# Allegro board micro_usb.brd
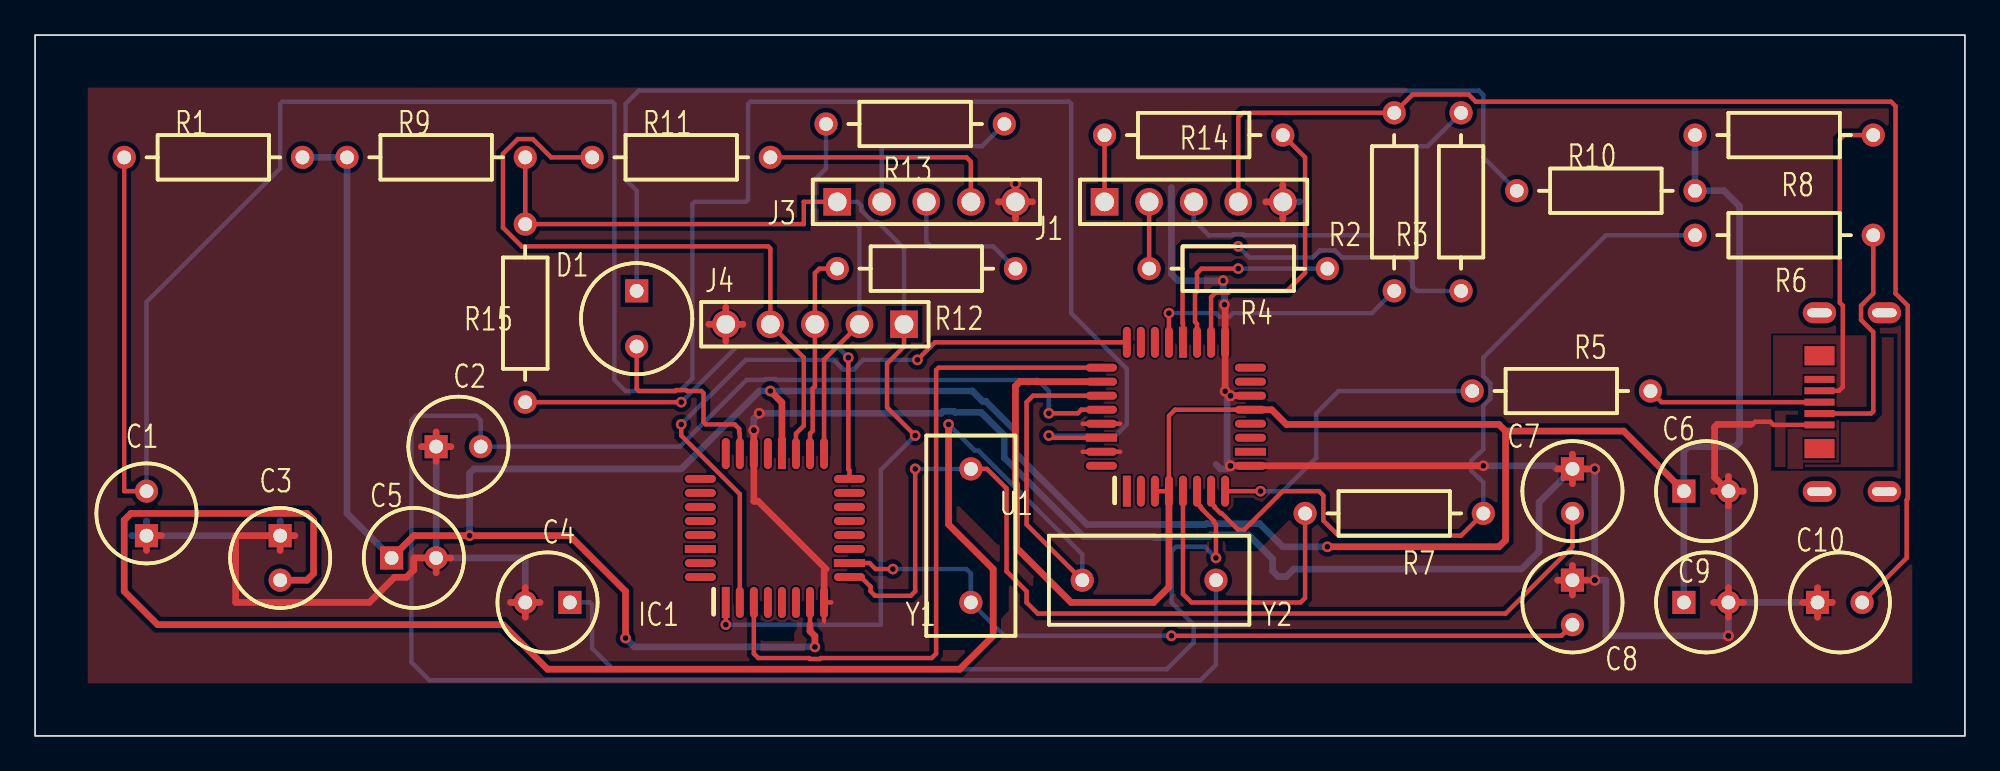
[diagram p0: board, top side]
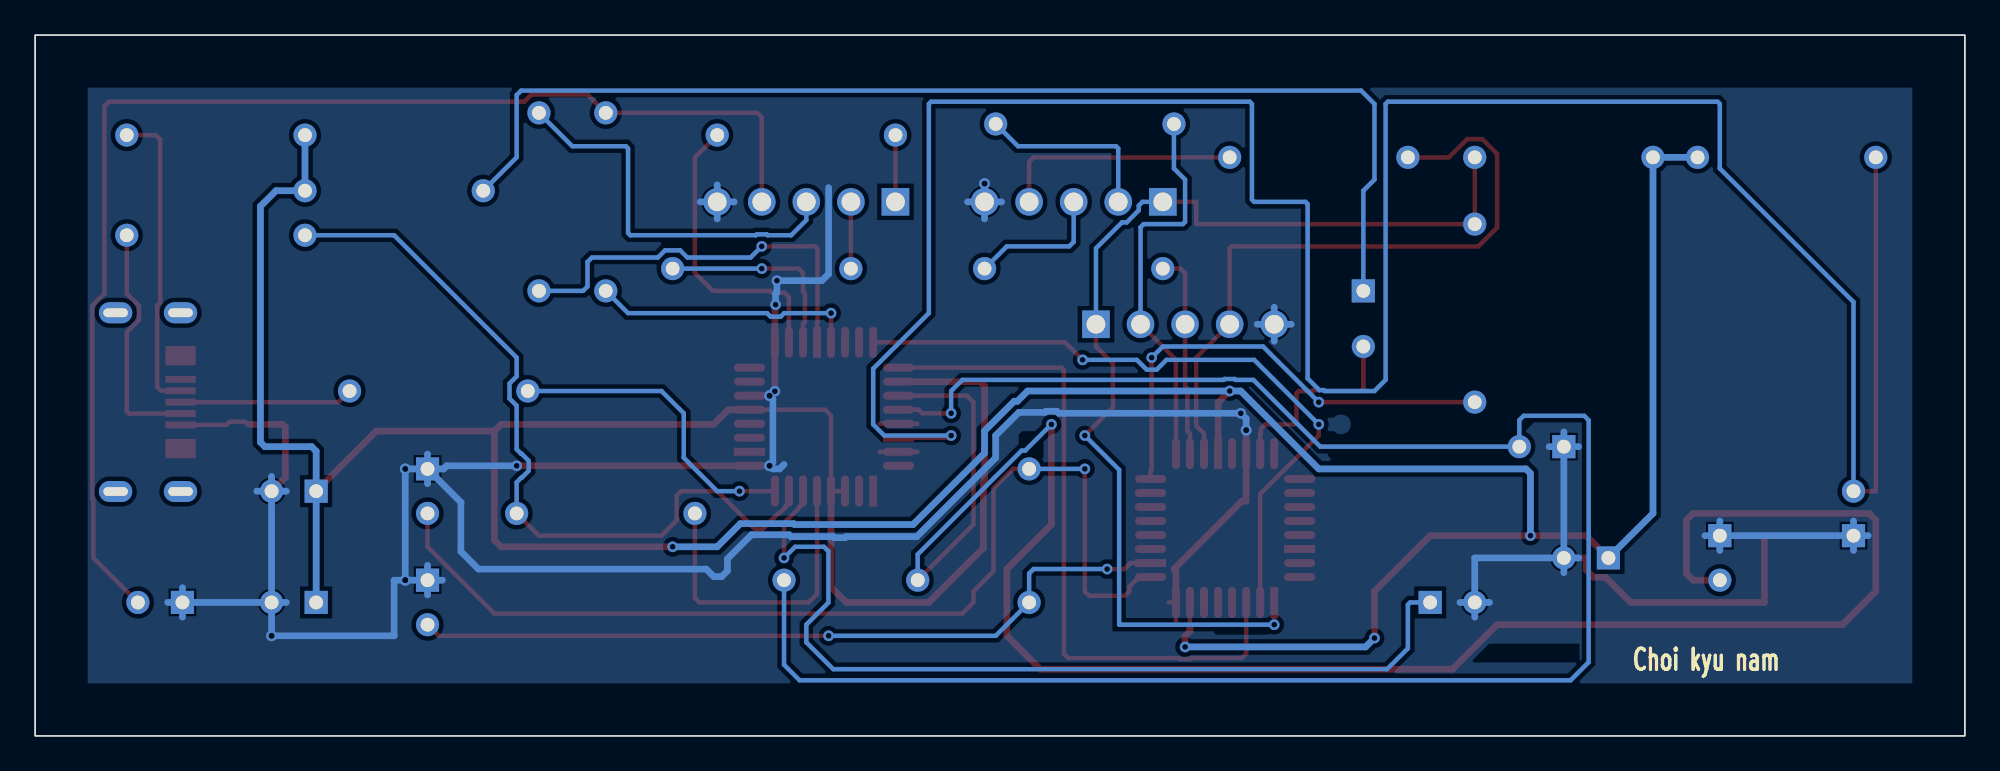
[diagram p1: board, bottom side, seen from below]

Outline 110 x 40 mm; copper layers: TOP, BOTTOM. Coordinates in mm from the lower left corner of the outline.
Outline path: rectangle 0,0 110,40

## Design rules (mm)
net group POWERNETS: nets GND VCC

## Placement (name value [footprint] x y rotation side)
C1  47nF  [CPCYL1D225LS100031]  6.35 11.43 90 top
C2  27pF  [CPCYL1D225LS100031]  22.86 16.51 0 top
C3  27pF  [CPCYL1D225LS100031]  13.97 11.43 270 top
C4  47nF  [CPCYL1D225LS100031]  30.48 7.62 180 top
C5  100nF  [CPCYL1D225LS100031]  20.32 10.16 0 top
C6  1uF  [CPCYL1D225LS100031]  93.98 13.97 0 top
C7  100nF  [CPCYL1D225LS100031]  87.63 15.24 270 top
C8  100nF  [CPCYL1D225LS100031]  87.63 8.89 270 top
C9  100nF  [CPCYL1D225LS100031]  93.98 7.62 0 top
C10  22nF  [CPCYL1D225LS100031]  101.6 7.62 0 top
D1  LED  [CYLD250LS125031]  34.29 25.4 270 top
IC1  ATmega8  [QUAD80M32WG900]  39.37 7.62 0 top
J1  bbpg_Bitbang  [BLKCON100VHTM1SQSW1005]  60.96 30.48 0 top
J2  USBA  [MICRO_USB]  105.41 19.05 90 top
J3  avrusb500_out  [BLKCON100VHTM1SQSW1005]  45.72 30.48 0 top
J4  firmware_in  [BLKCON100VHTM1SQSW1005]  49.53 23.5 180 top
NOREF  -  []  110 0 90 top
NOREF#2  -  []  0 40 0 top
R1  470  [AX400X100031]  5.08 33.02 0 top
R2  220  [AX400X100031]  77.47 25.4 90 top
R3  220  [AX400X100031]  81.28 25.4 90 top
R4  220  [AX400X100031]  73.66 26.67 180 top
R5  27  [AX400X100031]  92.08 19.68 180 top
R6  27  [AX400X100031]  104.78 28.57 180 top
R7  1.5k  [AX400X100031]  82.55 12.7 180 top
R8  2.2  [AX400X100031]  104.78 34.29 180 top
R9  10k  [AX400X100031]  17.78 33.02 0 top
R10  470  [AX400X100031]  84.45 31.11 0 top
R11  1k  [AX400X100031]  31.75 33.02 0 top
R12  220  [AX400X100031]  45.72 26.67 0 top
R13  1k  [AX400X100031]  45.09 34.92 0 top
R14  220  [AX400X100031]  71.12 34.29 180 top
R15  220  [AX400X100031]  27.94 19.05 90 top
U1  FT232BM  [QUAD80M32WG900]  62.23 13.97 0 top
Y1  3.6864Mhz  [RAD450X200LS300031]  53.34 7.62 90 top
Y2  6Mhz  [RAD450X200LS300031]  67.31 8.89 180 top

## Library data of the parts
C1-C5 C7-C10 = CAPACITOR NON-POL: alternate symbols: (SMDCAP)
C6 = CAPACITOR POL: alternate symbols: (SMDCAP)
D1 = LED
IC1 = ATmega8-DIL28_1
J1 J3 J4 = CON5
J2 = CON4_7
R1-R15 = R: alternate symbols: (SMDRES)
U1 = FT232BM_2
Y1 Y2 = ZTA

## Footprints (pads in the part's own frame, mm; a bottom-side part is the same pattern mirrored in y, then rotated)
AX400X100031
  round 1.321 hole 0.787: 1(0,0) 2(10.16,0)
BLKCON100VHTM1SQSW1005
  rect 1.575x1.575 hole 1.067: 1(0,0)
  round 1.575 hole 1.067: 2(2.54,0) 3(5.08,0) 4(7.62,0) 5(10.16,0)
CPCYL1D225LS100031
  rect 1.321x1.321 hole 0.787: 1(0,0)
  round 1.321 hole 0.787: 2(2.54,0)
CYLD250LS125031
  rect 1.321x1.321 hole 0.787: 1(0,0)
  round 1.321 hole 0.787: 2(3.175,0)
MICRO_USB
  oval 1.2x1.9 hole 0.5x1.4: (-5.1,3.7) (-5.1,0) (5.1,3.7) (5.1,0)
  rect 1.1x1.72 smd: (-2.65,3.7) (2.65,3.7)
  rect 0.4x1.72 smd: 1(-1.3,3.7) 2(-0.65,3.7) 3(0,3.7) 4(0.65,3.7) 5(1.3,3.7)
QUAD80M32WG900
  rect 0.457x1.778 smd: 1(0,0) 20(3.2,8.496)
  oval 0.457x1.778 smd: 2(0.8,0) 3(1.6,0) 4(2.4,0) 5(3.2,0) 6(4,0) 7(4.801,0) 8(5.601,0) 17(5.601,8.496) 18(4.801,8.496) 19(4,8.496) 21(2.4,8.496) 22(1.6,8.496) 23(0.8,8.496) 24(0,8.496)
  oval 1.778x0.457 smd: 9(7.048,1.448) 11(7.048,3.048) 12(7.048,3.848) 13(7.048,4.648) 14(7.048,5.448) 15(7.048,6.248) 16(7.048,7.048) 25(-1.448,7.048) 26(-1.448,6.248) 27(-1.448,5.448) 28(-1.448,4.648) 29(-1.448,3.848) 31(-1.448,2.248) 32(-1.448,1.448)
  rect 1.778x0.457 smd: 10(7.048,2.248) 30(-1.448,3.048)
RAD450X200LS300031
  round 1.321 hole 0.787: 1(0,0) 2(7.62,0)

## Nets
+5V: J2.4 R8.1
GND: C1.1 C2.1 C3.1 C4.2 C5.2 C6.2 C7.1 C8.1 C9.2 C10.1 IC1.8(GND) IC1.22(AGND) J1.5 J2.1 J3.5 J4.5 U1.9(GND) U1.14(PWRCTL) U1.17(GND1) U1.29(AGND) U1.31(TEST)
VCC: C5.1 C6.1 C9.1 IC1.7(VCC) IC1.20(AVCC) R1.2 R8.2 R9.1 R10.2 U1.3(VCC) U1.4(RESET#) U1.13(VCC-IO) U1.26(VCC1)
BMISO: J1.3 R3.2
BMOSI: J1.2 R4.2
BRESET: J1.1 R14.2
BSCK: C10.2 J1.4 R2.2
D+: J2.2 R6.1
D-: J2.3 R5.1
F_MISO: IC1.18((MISO) PB4) J4.3 R12.1
F_MOSI: IC1.17((OC2/MOSI) PB3) J4.2 R13.1
F_SCK: IC1.19((SCK) PB5) J4.4 R11.1
MISO: J3.3 R12.2
MOSI: J3.2 R13.2
RESET: IC1.1(PC6 (R\E\S\E\T\)) J3.1 J4.1 R9.2 R15.2
RXD: IC1.2(PD0 (RXD)) U1.24(RXD)
SCK: J3.4 R11.2
TXD: IC1.3(PD1 (TXD)) U1.25(TXD)
N02483: R6.2 R7.1 U1.7(USBDP)
N02615: R5.2 U1.8(USBDM)
N03527: C4.1 U1.6(3V3OUT)
N06839: R2.1 U1.21(DTR#)
N06967: R3.1 U1.20(DSR#)
N07033: R4.1 U1.19(DCD#)
N07247: R14.1 U1.18(RI#)
N11951: R7.2 U1.5(RSTOUT#)
N15182: C7.2 IC1.9(PB6 (XT1/TOSC1)) Y1.2
N15289: C8.2 IC1.10(PB7 (XT2/TOSC2)) Y1.1
N19734: D1.2(CATHODE) IC1.23((ADC0) PC0)
N20572: D1.1(ANODE) R10.1
N22544: IC1.16((SS/OC1B) PB2) R15.1
N41098: C3.2 U1.27(XTIN) Y2.2
N41106: C2.2 U1.28(XTOUT) Y2.1
N49165: C1.2 R1.1 U1.30(AVCC)

Pads without a net: IC1 4 5 6 11 12 13 14 15 21 24 25 26 27 28 29 30 31 32; J2 5; U1 1 2 10 11 12 15 16 22 23 32

## Via types
v1: diameter 0.61, hole 0.33, TOP to BOTTOM, 42 vias

## Routing (per net, layer and track width the routed paths; a pad name or vN(x,y) marks a point on that pad's centre or on a via; arc(x,y) is an arc through that point)
+5V: length 17.6
  TOP w0.254: J2.4 102.82,19.7 103.04,19.92 103.04,24.56 102.87,24.73 102.87,34.04 103.12,34.29 R8.1
GND: length 271.5
  TOP w0.254: 45.38,7.62 IC1.8 44.97,6.55 ; 59.71,17.82 U1.29 61.85,17.82 ; J2.1 99.09,17.75 98.91,17.93 98.04,17.93 97.89,17.78 97.79,17.78 ; 61.85,16.22 U1.31 59.71,16.22
  TOP w0.381: 96.52,13.13 C6.2 ; C6.2 95.73,14.76 95.73,17.63 95.89,17.78 97.79,17.78 ; C6.2 97.36,13.97 ; C6.2 95.68,13.97 ; C6.2 96.52,14.81 ; 6.35,10.59 C1.1 7.19,11.43 ; 96.52,6.78 C9.2 ; C9.2 96.52,8.46 ; C9.2 95.68,7.62 ; C9.2 97.36,7.62 ; 71.12,29.51 J1.5 ; J1.5 70.15,30.48 ; J1.5 71.12,31.45 ; 100.76,7.62 C10.1 ; C10.1 101.6,8.46 ; C10.1 101.6,6.78 ; C10.1 102.44,7.62 ; 13.97,10.59 C3.1 ; C3.1 14.81,11.43 ; C3.1 11.43,11.43 11.43,7.62 19.05,7.62 20.48,9.05 21.16,9.05 21.59,9.48 21.59,10.16 21.88,10.16 ; J4.5 40.34,23.5 ; J4.5 38.4,23.5 ; J4.5 39.37,22.53 ; J4.5 39.37,24.46 ; 87.63,14.4 C7.1 ; C7.1 88.47,15.24 ; C7.1 86.79,15.24 ; C7.1 87.63,16.08 ; 22.86,9.32 C5.2 ; C5.2 23.7,10.16 ; C5.2 22.02,10.16 ; v1(82.55,15.42) U1.9 v1(68.14,15.42) ; 55.88,29.51 J3.5 ; J3.5 54.91,30.48 ; J3.5 56.85,30.48 ; J3.5 55.88,31.45 ; v1(67.79,24.61) 67.83,24.57 U1.17 v1(67.83,19.67) ; C2.1 22.86,17.35 ; C2.1 22.86,15.67 ; C2.1 23.7,16.51 ; C2.1 22.02,16.51 ; 44.97,9.4 IC1.8 ; C4.2 28.78,7.62 ; C4.2 27.1,7.62 ; C4.2 27.94,6.78 ; C4.2 27.94,8.46 ; U1.14 v1(68.14,19.42) ; v1(40.97,17.45) IC1.22 40.97,13.4 41.21,13.4 45.09,9.53 ; 87.63,8.05 C8.1 ; C8.1 88.47,8.89 ; C8.1 86.79,8.89 ; C8.1 87.63,9.73
  BOTTOM w0.381: J1.5 71.12,31.45 ; J1.5 70.15,30.48 ; J1.5 71.12,29.51 ; J1.5 72.09,30.48 ; 38.4,23.5 J4.5 ; J4.5 39.37,24.46 ; J4.5 40.34,23.5 ; J4.5 39.37,22.53 ; 54.91,30.48 J3.5 ; J3.5 v1(55.88,31.52) ; J3.5 55.88,29.51 ; J3.5 56.85,30.48 ; C10.1 C9.2 ; C10.1 102.44,7.62 ; C10.1 101.6,8.46 ; C10.1 101.6,6.78 ; C9.2 95.68,7.62 ; C9.2 v1(96.52,5.71) 89.53,5.71 89.53,8.89 v1(88.9,8.89) ; C9.2 C6.2 ; 87.63,8.05 C8.1 ; C8.1 v1(88.9,8.89) ; C8.1 87.63,9.73 ; C8.1 86.79,8.89 ; C2.1 C5.2 ; C2.1 23.7,16.51 ; C2.1 22.86,17.35 ; C2.1 22.02,16.51 ; C5.2 22.86,9.32 ; C5.2 22.02,10.16 ; C5.2 27.94,10.16 C4.2 ; v1(67.83,19.67) 68.08,19.42 v1(68.14,19.42) 67.94,19.23 67.94,15.61 v1(68.14,15.42) 67.96,15.24 67.56,15.24 67.31,15.49 ; 13.97,10.59 C3.1 ; C3.1 13.97,12.27 ; C3.1 14.81,11.43 ; C3.1 C1.1 ; C4.2 28.78,7.62 ; C4.2 27.94,6.78 ; C4.2 27.1,7.62 ; v1(88.9,8.89) v1(88.9,15.24) C7.1 ; v1(40.97,17.45) 40.97,18.11 v1(41.27,18.41) 51.65,18.41 51.76,18.53 52.38,18.53 52.44,18.47 53.92,18.47 55.24,17.14 55.24,15.88 59.74,11.38 63.76,11.38 63.83,11.31 64.44,11.31 64.51,11.38 66.92,11.38 67.03,11.48 69.16,11.48 70.54,10.11 70.54,9.42 70.86,9.1 71.32,9.1 71.75,9.53 84.73,9.53 85.72,10.52 85.72,13.34 C7.1 ; C6.2 97.36,13.97 ; C6.2 96.52,14.81 ; C6.2 95.68,13.97 ; C1.1 6.35,12.27 ; C1.1 5.51,11.43 ; C1.1 6.35,10.59 ; C7.1 86.72,15.24 86.54,15.42 v1(82.55,15.42) ; C7.1 87.63,16.08 ; C7.1 87.63,14.4 ; v1(67.79,24.61) 67.79,25.23 67.72,25.31 v1(67.72,25.98) 65.15,25.98 64.77,26.36 64.77,31.29
VCC: length 235.4
  TOP w0.254: 44.17,6.35 IC1.7 ; U1.3 U1.4 64.63,18.27 64.97,18.62 U1.13
  TOP w0.381: 83.82,17.4 90.55,17.4 C6.1 ; 83.82,17.4 83.44,17.78 71.32,17.78 70.48,18.62 U1.13 ; 83.82,17.4 83.82,11.18 83.44,10.79 v1(73.66,10.79) ; v1(44.45,5.08) 44.45,5.7 44.17,5.98 44.17,6.35 ; C5.1 21.59,11.43 v1(24.77,11.43) 30.48,11.43 33.66,8.26 v1(33.66,5.59) ; IC1.20 42.57,19.02 v1(41.91,19.68) ; U1.26 56.13,20.22 55.88,19.96 55.88,14.43 55.94,14.36 55.94,10.73 59.05,7.62 63.75,7.62 64.63,8.5 U1.4
  BOTTOM w0.381: C9.1 C6.1 93.98,16.26 94.23,16.51 96.9,16.51 97.16,16.76 97.16,30.23 96.27,31.11 R10.2 R8.2 ; v1(73.66,10.79) 71.12,10.79 69.8,12.12 66.76,12.12 66.71,12.06 59.95,12.06 55.88,16.14 55.88,17.41 54.19,19.1 54.01,19.1 53.42,19.68 v1(41.91,19.68) 41.28,19.68 36.83,15.24 25.02,15.24 24.77,14.99 v1(24.77,11.43) ; R1.2 R9.1 17.78,12.7 C5.1 ; v1(44.45,5.08) 34.16,5.08 v1(33.66,5.59)
BMISO: length 22.4
  BOTTOM w0.254: R3.2 79.38,33.66 76.33,33.66 76.2,33.53 76.2,28.7 76.07,28.57 68.92,28.57 68.86,28.63 68.3,28.63 68.24,28.57 66.9,28.57 66.04,29.44 J1.3
BMOSI: length 3.8
  TOP w0.254: J1.2 R4.2
BRESET: length 3.8
  TOP w0.254: R14.2 J1.1
BSCK: length 72.8
  TOP w0.254: C10.2 106.68,10.16 106.68,13.48 106.74,13.54 106.74,24.56 106.05,25.25 106.05,35.94 105.79,36.2 82.12,36.2 81.71,36.6 78.51,36.6 R2.2 68.83,35.56 68.58,35.31 J1.4
D+: length 13.7
  TOP w0.254: R6.1 104.78,25.25 104.08,24.56 104.08,23.74 104.78,23.05 104.78,18.53 104.65,18.4 J2.2
D-: length 9.9
  TOP w0.254: R5.1 92.71,19.05 J2.3
F_MISO: length 11.8
  TOP w0.254: IC1.18 44.17,17.26 44.32,17.41 44.32,19.82 44.45,19.95 J4.3 44.45,26.42 44.7,26.67 R12.1
F_MOSI: length 22.9
  TOP w0.254: J4.2 44.97,21.48 IC1.17
  BOTTOM w0.254: 46.99,22.86 J4.2 46.99,29.03 46.81,29.21 44.58,29.21 44.45,29.34 44.45,31.75 45.09,32.38 R13.1
F_SCK: length 38.5
  TOP w0.254: IC1.19 43.37,17.26 43.81,17.7 43.81,21.59 J4.4 41.91,27.81 41.78,27.94 27.74,27.94 26.67,29.01 26.67,33.22 27.51,34.06 28.37,34.06 29.41,33.02 R11.1
MISO: length 8
  BOTTOM w0.254: J3.3 50.8,28.19 51.05,27.94 54.61,27.94 R12.2
MOSI: length 10.6
  BOTTOM w0.254: J3.2 48.26,33.53 48.39,33.66 53.98,33.66 55.24,34.92
RESET: length 61.4
  TOP w0.254: v1(50.16,17.14) 48.56,18.75 48.56,21.26 49.53,22.23 J4.1 ; R9.2 R15.2 43.81,29.21 43.81,30.48 J3.1 ; IC1.1 v1(39.37,6.35)
  BOTTOM w0.254: v1(50.16,17.14) 48.21,15.19 48.21,6.35 v1(39.37,6.35) ; J3.1 46.88,30.48 47.09,30.27 47.09,30 47.78,29.31 48.05,29.31 49.53,27.83 J4.1
RXD: length 39.3
  TOP w0.254: v1(50.29,21.46) 51.3,22.47 U1.24 ; IC1.2 40.17,13.8 36.83,17.15 v1(36.83,17.78)
  BOTTOM w0.254: v1(36.83,17.78) 40.51,21.46 45.51,21.46 46.07,20.9 46.64,20.9 47.2,21.46 v1(50.29,21.46)
SCK: length 13.8
  TOP w0.254: R11.2 53.09,33.02 53.34,32.77 J3.4
TXD: length 39.9
  TOP w0.254: IC1.3 40.97,4.7 41.22,4.45 44.11,4.45 44.16,4.39 44.73,4.39 44.79,4.45 51.1,4.45 51.36,4.7 51.36,20.88 51.5,21.02 U1.25 61.42,21.02
N02483: length 45
  TOP w0.254: 67.03,13.97 67.03,13.31 67.22,13.12 67.22,13.06 67.58,12.7 67.64,12.7 68.56,11.78 68.93,11.78 71.12,13.97 73.18,13.97 73.43,13.72 73.43,12.29 74.3,11.43 81.28,11.43 R7.1
  BOTTOM w0.254: R6.2 89.53,28.57 82.55,21.59 82.55,20.52 82.96,20.12 82.96,19.25 82.55,18.85 82.55,16.36 82.3,16.1 82.27,16.1 81.86,15.7 81.86,15.13 82.27,14.73 82.3,14.73 82.55,14.48 R7.1
N02615: length 17.9
  TOP w0.254: v1(69.85,13.97) U1.8
  BOTTOM w0.254: R5.2 74.3,19.68 73.03,18.41 73.03,15.88 71.12,13.97 v1(69.85,13.97)
N03527: length 52.1
  TOP w0.254: U1.6 66.23,13.31 66.42,13.12 66.42,13.06 66.53,12.95 66.53,12.93 67.19,12.26 67.19,12.18 67.31,12.06 v1(67.31,10.16)
  BOTTOM w0.254: C4.1 31.62,7.62 31.75,7.49 31.75,5 32.94,3.81 64.5,3.81 66.04,5.35 66.04,6.35 64.78,7.61 64.78,10.54 65.03,10.79 66.67,10.79 v1(67.31,10.16)
N06839: length 15.2
  TOP w0.254: U1.21 v1(64.63,24.13)
  BOTTOM w0.254: v1(64.63,24.13) 67.3,24.13 67.51,23.93 68.08,23.93 68.28,24.13 76.2,24.13 R2.1
N06967: length 23.5
  TOP w0.254: v1(68.58,27.94) 65.53,27.94 65.41,27.81 65.41,23.57 65.43,23.55 U1.20 65.41,22.44
  BOTTOM w0.254: v1(68.58,27.94) 69.22,27.3 72.82,27.3 73.23,27.71 74.09,27.71 74.5,27.3 78.26,27.3 78.51,27.05 78.51,25.65 78.77,25.4 R3.1
N07033: length 11.6
  TOP w0.254: v1(68.58,26.67) 66.48,26.67 66.23,26.42 66.23,25.37 66.12,25.25 66.12,23.63 66.23,23.52 U1.19
  BOTTOM w0.254: v1(68.58,26.67) R4.1
N07247: length 16.9
  TOP w0.254: 67.03,22.47 67.03,25.04 67.28,25.3 68,25.3 68.1,25.4 71.36,25.4 72.39,26.43 72.39,33.02 R14.1
N11951: length 18
  TOP w0.254: U1.5 65.43,8.1 65.91,7.62 72.14,7.62 72.39,7.87 R7.2
N15182: length 58.9
  TOP w0.254: v1(50.16,15.24) 50.16,8.26 49.91,8 47.88,8 47.62,8.26 47.62,8.52 47.08,9.07 IC1.9 ; C7.2 87.63,10.79 83.82,6.99 57.15,6.99 56.52,7.62 56.52,8.26 55.37,9.4 55.37,14.12 54.26,15.24 Y1.2
  BOTTOM w0.254: v1(50.16,15.24) Y1.2
N15289: length 44.2
  TOP w0.254: v1(48.9,9.52) 47.91,9.52 47.56,9.87 IC1.10 ; C8.2 87,5.71 v1(64.77,5.71)
  BOTTOM w0.254: v1(48.9,9.52) 48.89,9.53 53.09,9.53 53.34,9.27 Y1.1 55.24,5.71 v1(64.77,5.71)
N19734: length 11.6
  TOP w0.254: D1.2 34.29,19.81 34.42,19.68 36.49,19.68 36.55,19.74 37.12,19.74 37.17,19.68 37.97,19.68 38.1,19.56 38.1,17.91 38.23,17.78 39.88,17.78 40.13,17.53 40.13,17.3 40.17,17.26 IC1.23
N20572: length 66.5
  BOTTOM w0.254: D1.1 34.29,31.11 33.66,31.75 33.66,36.07 34.42,36.83 82.3,36.83 82.55,36.58 82.55,33.02 R10.1
N22544: length 26.9
  TOP w0.254: R15.1 v1(36.83,19.05) ; v1(46.35,21.59) 46.35,15.21 46.42,15.15 IC1.16
  BOTTOM w0.254: v1(46.35,21.59) 45.72,22.23 40.01,22.23 v1(36.83,19.05)
N41098: length 113.6
  TOP w0.254: U1.27 56.88,19.42 56.52,19.05 56.52,14.6 56.52,14.6 56.52,12.06 Y2.2
  TOP w0.381: v1(52.07,17.78) 52.07,12.06 54.61,9.53 54.61,5.71 52.7,3.81 29.21,3.81 26.67,6.35 6.99,6.35 5.08,8.26 5.08,12.32 5.46,12.7 15.49,12.7 15.88,12.32 15.88,9.27 15.49,8.89 C3.2
  BOTTOM w0.254: v1(52.07,17.78) 53.57,16.28 53.77,16.28 59.69,10.36 Y2.2
N41106: length 109.6
  TOP w0.254: v1(57.78,18.41) 59.44,18.41 59.64,18.62 U1.28
  BOTTOM w0.254: Y2.1 67.31,4.06 66.42,3.17 22.48,3.17 21.45,4.21 21.45,18.02 21.7,18.27 25.15,18.27 25.4,18.02 C2.2 36.75,16.51 40.56,20.32 41.57,20.32 41.62,20.37 42.2,20.37 42.25,20.32 57.15,20.32 57.78,19.68 v1(57.78,18.41)
N49165: length 150.1
  TOP w0.254: R1.1 5.08,13.97 C1.2 ; v1(57.78,17.14) 57.91,17.02 U1.30
  BOTTOM w0.254: v1(57.78,17.14) 61.59,17.14 62.23,17.78 62.23,20.95 59.05,24.13 59.05,36.07 58.93,36.2 40.77,36.2 40.64,36.07 40.64,30.61 40.51,30.48 37.59,30.48 37.47,30.35 37.47,20.4 36.8,19.74 36.55,19.74 36.49,19.68 33.66,19.68 33.02,20.32 33.02,36.07 32.89,36.2 14.1,36.2 13.97,36.07 13.97,32.38 6.35,24.77 C1.2

## Copper pours and planes (outline as drawn; the poured copper is in the pictures)
+5V on TOP: 99.06,22.86 99.06,15.24 106.05,15.24 106.05,22.86 ; 2 cut-outs
GND on TOP: 3,3 3,37 107,37 107,3 ; 14 cut-outs
GND on BOTTOM: 3,3 3,37 107,37 107,3 ; 11 cut-outs

## Text on the board
Ref Des/Silkscreen Bottom: Choi kyu nam
DIMENSION: FIGURE | SIZE | 0.33 | 0.787 | 1.067 | 1.4x0.5 | DRILL CHART: TOP to BOTTOM | ALL UNITS ARE IN MILLIMETERS | PLATED | QTY | 42 | 56 | 15 | 4
